# Altium PCB Gator Stream Receiver.PcbDoc
Units mil, origin at the board's own origin, x right, y up, seen from the top; angles counter-clockwise.
Board outline 3850 x 2100 mil, 2 copper layers (Top Layer, Bottom Layer); 36 components, 38 nets, 262 pads, 49 vias.
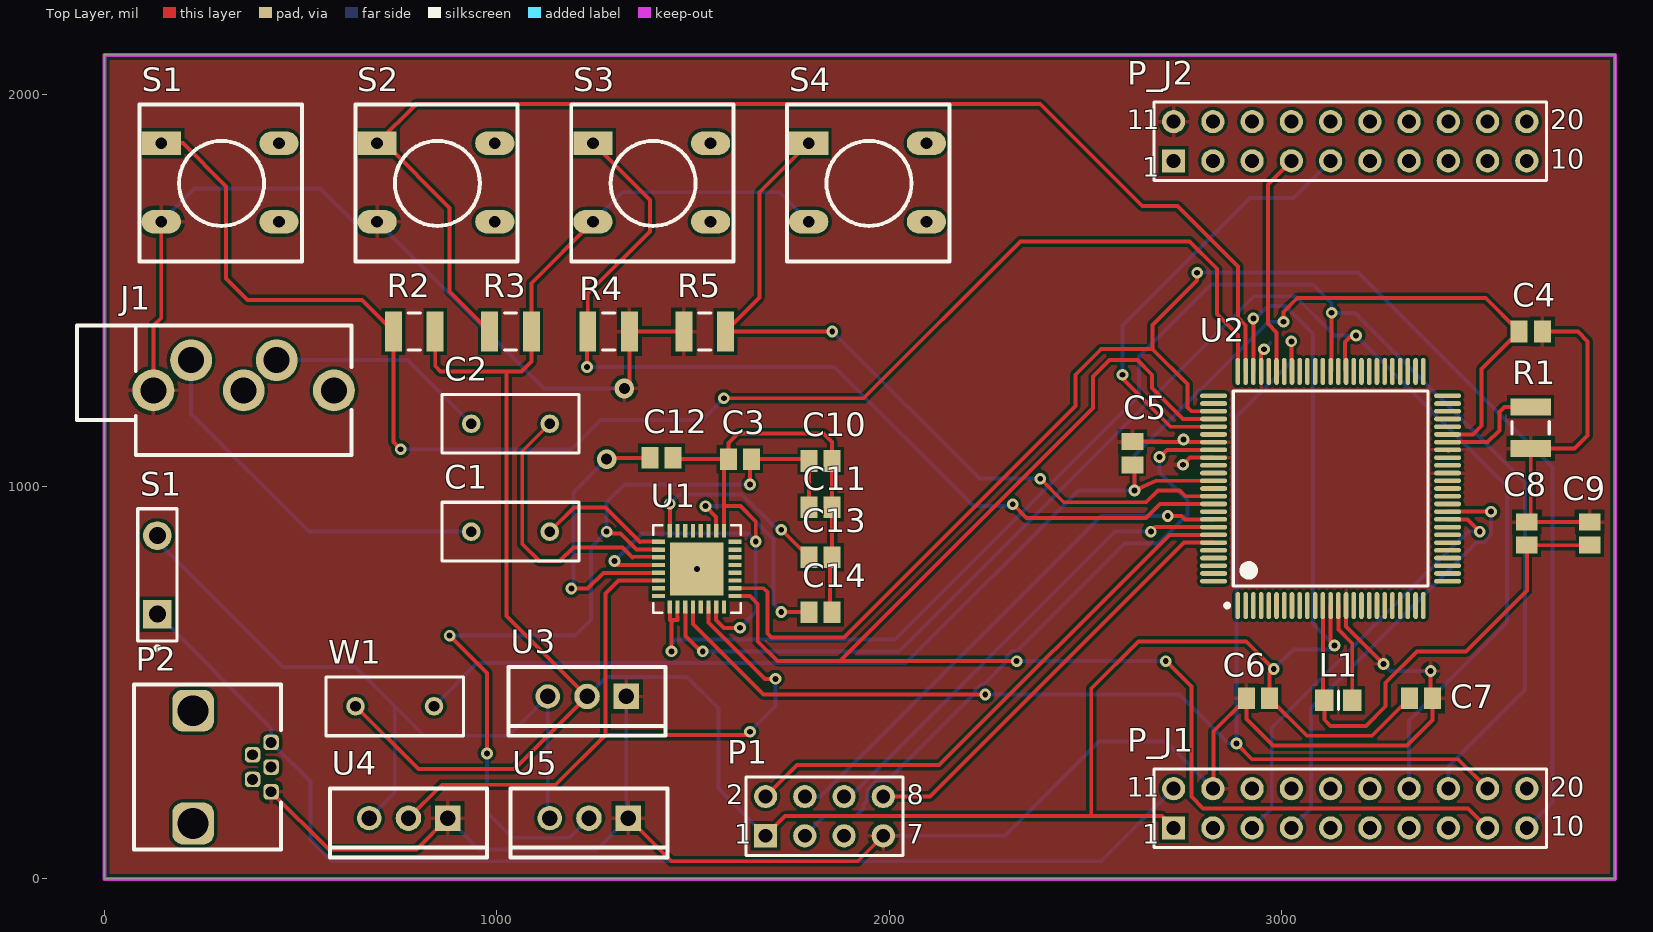
[diagram p0: Top Layer view]
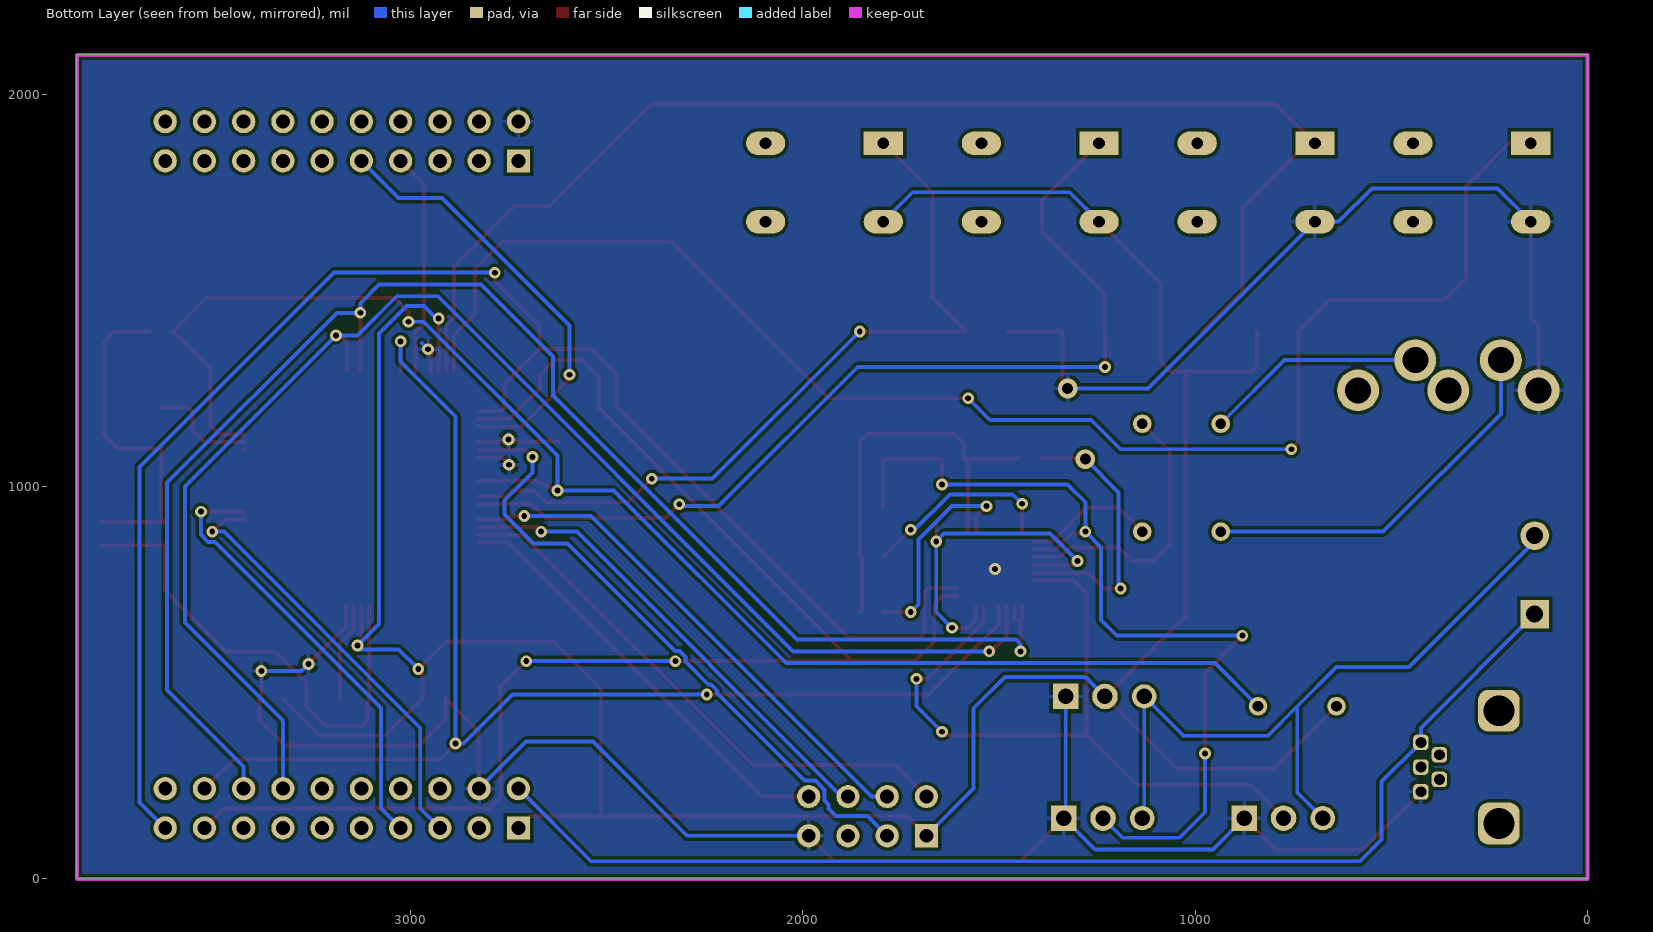
[diagram p1: Bottom Layer view, seen from below]

## Layer stack, top to bottom
Top Solder: solder mask 0.4, Solder Resist, Dk 3.5
Top Layer: signal copper 1.4
Dielectric 1: dielectric 12.6, FR-4, Dk 4.8
Bottom Layer: signal copper 1.4
Bottom Solder: solder mask 0.4, Solder Resist, Dk 3.5

## Board outline
0,0 0,2100 3850,2100 3850,0

## Design rules (kind name [scope] priority, off if disabled: settings)
Clearance [All] p1: gap=6 except(8: Arc-Poly Track-Poly SMDPad-Poly THPad-Poly Via-Poly Fill-Poly Poly-Poly)
PolygonConnect [All] p1: connectstyle=Relief reliefconductorwidth=10 reliefentries=4 polygonreliefangle="90 Angle" airgapwidth=10
RoutingVias [All] p1: holewidth=15 width=30 viastyle="Through Hole" minholewidth=13 minwidth=30 maxholewidth=28 maxwidth=50
SolderMaskExpansion [All] p1: expansion=4
Width [All] p1: maxlimit=10 minlimit=6 preferedwidth=10
30 further rules are at their usual default settings.

## Classes and differential pairs
component class "Gator Stream Receiver Top Sheet": C1 C2 J1 P2 R2 R3 R4 R5 R? S1 S2 S3 S4 S? U3 U4 U5 U?
component class MSP432: C4 C5 C6 C7 C8 C9 L1 P1 P_J1 P_J2 R1 U2 W1
component class "Audio output Codec": C3 C10 C11 C12 C13 C14 C? U1

## Components (designator, comment, footprint, x,y, rotation, side; value= is the part's Value field where it differs from the comment)
C1 "Cap Pol2" RAD-0.2 1035,885 r180 top
C2 "Cap Pol2" RAD-0.2 1035,1160 r180 top
C3 "Cap" C0805 1620,1070 r180 top
C4 "Cap" C0805 3635,1395 r0 top
C5 "Cap" C0805 2620,1085 r90 top
C6 "Cap" C0805 2940,460 r180 top
C7 "C5" C0805 3355,460 r0 top
C8 "Cap" C0805 3625,880 r270 top
C9 "Cap" C0805 3785,880 r90 top
C10 "Cap" C0805 1825,1065 r0 top
C11 "Cap" C0805 1825,947 r0 top
C12 "Cap" C0805 1420,1073.11 r0 top
C13 "Cap" C0805 1825,820 r0 top
C14 "Cap" C0805 1825,680 r0 top
J1 "3.5mm jack GM" "3.5mm jack GM" 125,1245 r270 top
L1 "LQM21PN4R7NGR" 6-0805_N 3144.69,455 r0 top
P1 "Header 4X2" HDR2X4 1685,110 r0 top
P2 "USB B mini TH" "USB B mini Molex" 425,285 r90 top
P_J1 "Header 10X2A" HDR2X10_CEN 2725,130 r0 top
P_J2 "Header 10X2A" HDR2X10_CEN 2725,1830 r0 top
R1 "Res3" 14-1210 3635,1150 r90 top
R2 "Res3" 14-1210 790,1395 r0 top
R3 "Res3" 14-1210 1035,1395 r0 top
R4 "Res3" 14-1210 1285,1395 r180 top
R5 "Res3" 14-1210 1530,1395 r0 top
S1 "Power Switch" SPST-2 135,775 r90 top
S1 "Disconnect" "SW PB" 145,1875 r0 top
S2 "Pause/Play" "SW PB" 695,1875 r0 top
S3 "FFW" "SW PB" 1245,1875 r0 top
S4 "REW" "SW PB" 1795,1875 r0 top
U1 "TLV320AIC3254_RH" RHB32_3P45X3P45 1510,790 r90 top
U2 "XMS432P401RIPZR" PZ0100A_N 3125,995 r90 top
U3 "LT1086  3.3V" TO-220 1130,465 r180 top
U4 "LT1086  3.3V" TO-220 675,155 r180 top
U5 "LT1086  3.3V" TO-220 1135,155 r180 top
W1 "Jumper" RAD-0.2 740,440 r180 top

## Footprints (in the part's own frame and the unit in brackets; to place one, negate y for a bottom-side part, rotate by r counter-clockwise, add the part's x,y. Pads: shape width x height; smd on the part's side, far side on the other; paste and mask are expansions set on the pad)
"3.5mm jack GM" [mil]
  round 106.5 hole 66.5: 1(0,0) 2(-77,96) 3(0,230) 4(-77,314) 5(0,460)
  silkscreen extent -165,-195 165,505
6-0805_N [mm] "Chip Resistor, Body 2.0x1.2mm, IPC Medium Density"
  rect 1.2x1.4 smd: 1(-0.9,0) 2(0.9,0)
  silkscreen extent 0,-0.6 0,0.6, body extent -1.07,-0.7 1.07,0.7, height 0.7
14-1210 [mm] "Chip Resistor, Body 3.2x2.5mm, IPC High Density"
  rect 1.1x2.6 smd: 1(-1.35,0) 2(1.35,0)
  silkscreen extent -0.4,-1.2 0.4,1.2, body extent -1.68,-1.32 1.68,1.32, height 0.9
C0805 [mm] "Chip Capacitor, Body 2.0x1.3mm, IPC High Density"
  rect 1.1x1.4 smd: 1(-0.75,0) 2(0.75,0)
  body extent -1.1,-0.72 1.1,0.72, height 1.4
HDR2X4 [mm] "Connector; Header; 4x2 Position"
  rect 1.5x1.5 hole 0.9: 1(0,0)
  round 1.5 hole 0.9: 2(0,2.54) 3(2.54,0) 4(2.54,2.54) 5(5.08,0) 6(5.08,2.54) 7(7.62,0) 8(7.62,2.54)
  silkscreen extent -1.27,-1.27 8.89,3.81
HDR2X10_CEN [mm] "Connector; Header; 10x2 Position"
  rect 1.5x1.5 hole 0.9: 1(0,0)
  round 1.5 hole 0.9: 2(2.54,0) 3(5.08,0) 4(7.62,0) 5(10.16,0) 6(12.7,0) 7(15.24,0) 8(17.78,0) 9(20.32,0) 10(22.86,0) 11(0,2.54) 12(2.54,2.54) 13(5.08,2.54) 14(7.62,2.54) 15(10.16,2.54) 16(12.7,2.54) 17(15.24,2.54) 18(17.78,2.54) 19(20.32,2.54) 20(22.86,2.54)
  silkscreen extent -1.27,-1.27 24.13,3.81
PZ0100A_N [mm]
  oval 1.75x0.3 smd paste+0 mask+0.051: 1(-7.575,6) 2(-7.575,5.5) 3(-7.575,5) 4(-7.575,4.5) 5(-7.575,4) 6(-7.575,3.5) 7(-7.575,3) 8(-7.575,2.5) 9(-7.575,2) 10(-7.575,1.5) 11(-7.575,1) 12(-7.575,0.5) 13(-7.575,0) 14(-7.575,-0.5) 15(-7.575,-1) 16(-7.575,-1.5) 17(-7.575,-2) 18(-7.575,-2.5) 19(-7.575,-3) 20(-7.575,-3.5) 21(-7.575,-4) 22(-7.575,-4.5) 23(-7.575,-5) 24(-7.575,-5.5) 25(-7.575,-6) 51(7.575,-6) 52(7.575,-5.5) 53(7.575,-5) 54(7.575,-4.5) 55(7.575,-4) 56(7.575,-3.5) 57(7.575,-3) 58(7.575,-2.5) 59(7.575,-2) 60(7.575,-1.5) 61(7.575,-1) 62(7.575,-0.5) 63(7.575,0) 64(7.575,0.5) 65(7.575,1) 66(7.575,1.5) 67(7.575,2) 68(7.575,2.5) 69(7.575,3) 70(7.575,3.5) 71(7.575,4) 72(7.575,4.5) 73(7.575,5) 74(7.575,5.5) 75(7.575,6)
  oval 0.3x1.75 smd paste+0 mask+0.051: 26(-6,-7.575) 27(-5.5,-7.575) 28(-5,-7.575) 29(-4.5,-7.575) 30(-4,-7.575) 31(-3.5,-7.575) 32(-3,-7.575) 33(-2.5,-7.575) 34(-2,-7.575) 35(-1.5,-7.575) 36(-1,-7.575) 37(-0.5,-7.575) 38(0,-7.575) 39(0.5,-7.575) 40(1,-7.575) 41(1.5,-7.575) 42(2,-7.575) 43(2.5,-7.575) 44(3,-7.575) 45(3.5,-7.575) 46(4,-7.575) 47(4.5,-7.575) 48(5,-7.575) 49(5.5,-7.575) 50(6,-7.575) 76(6,7.575) 77(5.5,7.575) 78(5,7.575) 79(4.5,7.575) 80(4,7.575) 81(3.5,7.575) 82(3,7.575) 83(2.5,7.575) 84(2,7.575) 85(1.5,7.575) 86(1,7.575) 87(0.5,7.575) 88(0,7.575) 89(-0.5,7.575) 90(-1,7.575) 91(-1.5,7.575) 92(-2,7.575) 93(-2.5,7.575) 94(-3,7.575) 95(-3.5,7.575) 96(-4,7.575) 97(-4.5,7.575) 98(-5,7.575) 99(-5.5,7.575) 100(-6,7.575)
  silkscreen extent -7.7,-6.3 6.3,6.82, body extent 0,0 0.25,0.25, height 0.25
RAD-0.2 [mm] "Radial Cap, Thru-Hole; 2 Leads; 0.2 in Pin Spacing"
  round 1.2 hole 0.7: 1(-2.54,0) 2(2.54,0)
  silkscreen extent -4.44,-1.91 4.44,1.91
RHB32_3P45X3P45 [mm]
  rect 0.85x0.28 smd paste-0.412: 1(-2.475,1.75) 2(-2.475,1.25) 3(-2.475,0.75) 4(-2.475,0.25) 5(-2.475,-0.25) 6(-2.475,-0.75) 7(-2.475,-1.25) 8(-2.475,-1.75) 17(2.475,-1.75) 18(2.475,-1.25) 19(2.475,-0.75) 20(2.475,-0.25) 21(2.475,0.25) 22(2.475,0.75) 23(2.475,1.25) 24(2.475,1.75)
  rect 0.28x0.85 smd paste-0.412: 9(-1.75,-2.475) 10(-1.25,-2.475) 11(-0.75,-2.475) 12(-0.25,-2.475) 13(0.25,-2.475) 14(0.75,-2.475) 15(1.25,-2.475) 16(1.75,-2.475) 25(1.75,2.475) 26(1.25,2.475) 27(0.75,2.475) 28(0.25,2.475) 29(-0.25,2.475) 30(-0.75,2.475) 31(-1.25,2.475) 32(-1.75,2.475)
  rect 3.45x3.45 smd paste-1.712 mask-1.714: 33(0,0)
  silkscreen extent -2.83,-2.83 2.83,2.83, body extent -2.63,-2.63 2.63,2.63, height 1.4
SPST-2 [mm] "Switch; 2 Leads"
  rect 1.85x1.85 hole 1.1: 1(-2.54,0)
  round 1.85 hole 1.1: 2(2.54,0)
  silkscreen extent -4.89,-1.27 4.28,1.27
"SW PB" [mil]
  rect 100x60 hole 30: 1(0,0)
  oval 100x60 hole 30: 2(0,-200) 3(300,-200) 4(300,0)
  silkscreen extent -55,-302 358,98
TO-220 [mil]
  rect 65x65 hole 39.4: 1(-200,0)
  round 65 hole 39.4: 2(-100,0)
  round 62 hole 39.4: 3(0,0)
  silkscreen extent -300,-75 100,100
"USB B mini Molex" [mm]
  rrect50% 2.7x2.7 hole 2: 0(-3.65,5.05) 0(3.65,5.05)
  rrect50% 1x1 hole 0.7: 1(1.6,0) 2(0.8,1.2) 3(0,0) 4(-1.6,0) 5(-0.8,1.2)
  silkscreen extent -5.33,-0.64 5.33,8.89

## Part data
C1 C2: "Polarized Capacitor (Axial)"
C3 C4 C5 C6 C7 C10 C11 C12 C13 C14: library part "Cap Pol3", "Polarized Capacitor (Surface Mount)"
C8 C9: library part "Cap Semi", "Capacitor (Semiconductor SIM Model)"
L1: library part Inductor, "Inductor"
P1: "Header, 4-Pin, Dual row"
P_J1 P_J2: "Header, 10-Pin, Dual row"
R1 R2 R3 R4 R5: "Resistor"
S1: library part SW-SPST, "Single-Pole, Single-Throw Switch"
S1 S2 S3 S4: library part SW-PB, "DIGIKEY SW400-ND"
U1 U2: "Imported"
W1: "Jumper Wire"

## Via types
v1: diameter 30, hole 15, Top Layer to Bottom Layer, 47 vias
v2: diameter 50, hole 28, Top Layer to Bottom Layer, 2 vias

## Nets (pads, with @x,y where several pads share a name; then routed paths per layer and width w, separated by ;. In a path a pad name is that pad's centre, name@x,y a point inside that pad or via, vN(x,y) a via of type N, cw(c..) or ccw(c..) an arc to the next point about the centre after c; other vN are vias at no path point)
3V3: C6.1 C7.1 P1.1 P_J1.1 R2.2 R3.2 S3.2 S4.2 U2.13 U2.73 U3.2 W1.2 | length 7686.9
  Top Layer w10: W1.2 800,280 1045,280 U3.2 1025,670 1025,1293.23 ; R2.2 843.15,1306.85 856.77,1293.23 1025,1293.23 ; S3.2 1088.15,1518.15 R3.2 1088.15,1318.15 1063.23,1293.23 1025,1293.23 ; P1.1 1735,160 2515,160 ; P_J1.1 2695,160 2515,160 ; U2.73 v1(2928.15,1428.15) ; U2.13 3125,605 v1(3135,595) ; C7.1 3230.47,365 3064.53,365 C6.1 2969.53,524.53 v1(2980,535) 2910,605 2635,605 2515,485 2515,160
  Bottom Layer w10: U3.2 1280,515 1485,515 1565,435 1565,230 P1.1 ; S3.2 1320,1750 1720,1750 S4.2 ; v1(2928.15,1428.15) 2933.15,1428.15 2965,1460 3010,1460 3080,1390 3080,650 v1(3135,595) 3135,585 3030,585 v1(2980,535)
5V: P2.1 P_J1.11 S1.1@135,675 | length 3036
  Bottom Layer w10: S1.1@135,675 425,385 P2.1 525,247.99 525,100 580,45 2540,45 P_J1.11
AUDIO_OUT_L: C1.1 U1.25 | length 340.8
  Top Layer w10: C1.1 1197,947 1277.22,947 1365.31,858.91 1366.81,860.41 U1.25@1413.02,860.41
AUDIO_OUT_R: C2.1 U1.27 | length 727
  Top Layer w10: C2.1 1065,1090 1065,853.91 1108.91,810 1160,810 1195,845 1320,845 1345.47,819.54 1346.97,821.04 U1.27@1413.02,821.04
CODEC_GND: C3.2 C10.2 C11.2 C12.2 C13.2 C14.2 U1.7 U1.17 U1.28 | length 2084.6
  Top Layer w10: v1(1300,810) 1310.16,799.85 U1.28 ; C12.2 1452.64,1070 C3.2 ; U1.7 1559.21,659.41 1578.62,640 v1(1620,640) ; U1.17 1578.9,1058.43 C3.2 ; 1583.9,950 1620.94,950 1660,910.94 v1(1660,860) ; C13.2@1849.53,820 1849.53,685 C14.2 ; C13.2 C11.2 C10.2 1854.53,1113.58 1833.11,1135 1615,1135 1590.47,1110.47 C3.2
  Bottom Layer w10: v1(1300,810) 1370,880 1640,880 v1(1660,860) 1660,680 v1(1620,640)
CODEC_IOVDD: U1.6 U1.30 U4.2 | length 1919.2
  Top Layer w10: U4.2 860,240 1150,240 1277.22,367.22 ; 1277.22,520 1277.22,367.22 ; 1277.22,525 1277.22,727.38 1310,760.15 1388.48,760.15 ; 1365.31,760.46 U1.30 ; U1.6 1539.53,653.62 1683.15,510 v1(1710,510) ; v1(1645,375) 1637.22,367.22 1277.22,367.22
  Bottom Layer w10: v1(1645,375) 1710,440 v1(1710,510)
CODEC_LDOIN: C3.1 C10.1 C11.1 U1.26 U5.2 | length 2344.7
  Top Layer w10: v1(880,620) 975,525 v1(975,320) ; v1(1280,885) 1285,880 1315,880 1355.78,839.22 U1.26 ; v1(1645,1005) C3.1@1645,1065.47 ; C3.1 C10.1@1790.47,1070 ; C11.1 C10.1
  Bottom Layer w10: v1(880,620) 1200,620 1240,660 1240,845 v1(1280,885) 1280,960 1325,1005 v1(1645,1005) ; v1(975,320) 975,170 1040,105 1185,105 U5.2
CODEC_RESET: U1.31
DISCONNECT: R2.1 S1.1@145,1875 U2.75 | length 3848.4
  Top Layer w10: S1.1@145,1875 200,1875 310,1765 310,1530 365,1475 656.85,1475 R2.1 736.85,1113.15 v1(755,1095) ; v1(1578.62,1225) 1935,1225 2335,1625 2765,1625 2835,1555 2835,1440 2888.78,1386.22 U2.75
  Bottom Layer w10: v1(755,1095) 1190,1095 1265,1170 1523.62,1170 v1(1578.62,1225)
FFW: R4.2 S3.1 U2.90 | length 2478.9
  Top Layer w10: v1(1230,1305) R4.2@1230,1393.15 ; R4.2 1231.85,1491.85 1390,1650 1390,1730 S3.1 ; v1(2315,955) 2350,920 2655,920 2690.63,955.63 U2.90
  Bottom Layer w10: v1(1230,1305) 1860,1305 2215,950 2320,950 v1(2315,955)
GND: C4.2 C5.2 C6.2 C7.2 C8.1 C9.2 J1.1 P1.7 P2.4 P_J1.12 P_J2.11 R1.1 R4.1 R5.1 S1.2@145,1675 S2.2 U1.33 U2.15 U2.40 U2.43 U2.72 U2.82 U2.84 U3.1 U4.1 U5.1 | length 7832.7
  Top Layer w10: J1.1 125,1410 145,1430 S1.2@145,1675 ; P2.4 572.01,75 795,75 U4.1 ; v2(1325,1250) 1338.15,1263.15 R4.1 R5.1 ; U5.1 1445,45 1920,45 P1.7 ; C5.2 2693.58,1114.53 ; 2656.42,1113.11 v1@2745,1113.11 ; v1(2748.5,1055.47) 2766.77,1073.74 U2.84 ; v1(2750,1120) 2750,1118.11 2755,1113.11 U2.82 ; P_J1.12 2826.77,231.77 2826.77,376.3 C6.2 2910.47,407.52 2977.99,340 3320,340 3384.53,404.53 C7.2 ; U2.72 2947.83,1349.71 2954.71,1349.71 v1(2955,1350) ; U2.15 3164.37,643.43 v1(3260,547.8) ; C7.2@3380,464.53 v1(3380,530) ; U2.43 U2.43@3426.01,1090.65 ; C4.2 3755,1395 3780,1370 3780,1130 3746.85,1096.85 R1.1 3635,919.53 C8.1 C9.2
  Bottom Layer w10: S1.2@145,1675 230,1760 550,1760 635,1675 S2.2 1120,1250 v2(1325,1250) ; U4.1 955,75 1255,75 U5.1 ; U5.1@1330,160 U3.1 ; P1.7 2295,110 2535,350 2705,350 P_J1.12 ; v1(2750,1120) v1@2750,1132.96 ; v1(2955,1350) 2971.2,1366.2 ; v1(3260,547.8) 3277.8,530 v1(3380,530)
  other v1: 1510,790
I2S_BCLK: P_J1.18 U1.1 U1.2 U2.63 | length 4034.1
  Top Layer w10: U1.1 1441.1,660 1450.94,660 ; v1(1445,580) 1445,654.06 1450.94,660 ; U1.2@1459.96,692.56 1459.96,669.61 1460.79,668.79 1460.79,660 1450.94,660 ; U2.63 3127.78,1296.01 v1(3127.78,1442.78)
  Bottom Layer w10: v1(1445,580) 1445,598.11 1456.89,610 2015,610 2636.77,1231.77 2636.77,1331.77 2820,1515 3080,1515 3127.78,1467.22 v1(3127.78,1442.78) 3187.22,1442.78 3620,1010 3620,481.5 3425,286.5 P_J1.18
I2S_FS: P_J1.17 U1.3 U2.61 | length 3740.9
  Top Layer w10: U1.3 1480.47,619.53 1520,580 v1(1525,580) ; U2.61@3161.59,1296.01 3161.59,1368.41 3178.18,1385 v1(3190,1385)
  Bottom Layer w10: v1(1525,580) 2025,580 2930,1485 3035,1485 3135,1385 v1(3190,1385) 3575,1000 3575,654.06 3325,404.06 P_J1.17
I2S_SDOUT: P_J1.19 U1.4 U2.68 | length 3399.6
  Top Layer w10: U1.4 1500.16,650 1680.16,470 v1(2245,470) ; v1(2885,345) 2925,305 3450,305 P_J1.19 ; U2.68@3025,1294.8 v1(3025,1370)
  Bottom Layer w10: v1(2245,470) 2740,470 2865,345 v1(2885,345) 2885,1178.38 3025,1318.38 v1(3025,1370)
MSP_AVCC: C4.1 C5.1 U2.45 U2.87 W1.1 | length 3946.1
  Top Layer w10: C5.1@2625,1055.47 v1(2625,990) 2679.69,1014.69 U2.87 ; v1(3005,1420) 3005,1445 3040,1480 3520.47,1480 C4.1 3510,1299.53 3510,1155 3487.8,1132.8 U2.45
  Bottom Layer w10: W1.1 950,550 2042.21,550 2482.21,990 v1(2625,990) 2625,1078.7 2966.3,1420 v1(3005,1420)
MSP_CODEC_SCL: P_J1.9 U1.9 U2.79 | length 3781.2
  Top Layer w10: U1.9 1645,721.09 1665,701.09 1665,605 1715,555 1875,555 ; v1(2325,555) 1875,555 ; v1(2705,555) 2770,490 2770,210 2800,180 3475,180 P_J1.9 ; U2.79 2748.5,1172.17 2670,1250.67 2670,1285 2633,1322 2562,1322 2520,1280 2520,1200 1875,555
  Bottom Layer w10: v1(2325,555) v1(2705,555)
MSP_CODEC_SDA: P_J1.10 U1.10 U2.78 | length 4084.1
  Top Layer w10: U1.10 1680,740.78 1690,730.78 1690,625 1700,615 1885,615 2475,1205 2475,1285 2540,1350 2671.43,1350 ; v1(2785,1545) 2785,1525 2671.43,1411.43 2671.43,1350 ; U2.78 2770,1191.85 2760,1201.85 2760,1261.43 2671.43,1350
  Bottom Layer w10: v1(2785,1545) 3195,1545 3690,1050 3690,195 P_J1.10
NetC1_2: C1.2 J1.2 | length 975.3
  Bottom Layer w10: J1.2 221,1185 521,885 C1.2
NetC2_2: C2.2 J1.4 | length 563.1
  Bottom Layer w10: J1.4 773,1322 C2.2
NetC12_1: C12.1 U1.29 | length 718.2
  Top Layer w10: v1(1190,740) 1231.5,740 1271.66,780.15 U1.29 ; v2(1280,1070) 1283.11,1073.11 C12.1
  Bottom Layer w10: v1(1190,740) 1195,745 1195,985 v2(1280,1070)
NetC13_1: C13.1 U1.24 | length 498.7
  Top Layer w10: U1.24 v1(1441.1,956.1) ; v1(1725,890) C13.1@1795,820
  Bottom Layer w10: v1(1441.1,956.1) 1465,980 1625,980 1715,890 v1(1725,890)
NetC14_1: C14.1 U1.18 | length 545.8
  Top Layer w10: v1(1532,950) 1559.21,922.79 U1.18 ; v1(1725,680) C14.1
  Bottom Layer w10: v1(1532,950) 1620,950 1705,865 1705,700 v1(1725,680)
NetR1_2: R1.2 U2.44 | length 276.5
  Top Layer w10: U2.44 3525,1113.11 3555,1143.11 3555,1190 3568.15,1203.15 R1.2
PAUSE_PLAY: R3.1 S2.1 U2.74 | length 3293.3
  Top Layer w10: R3.1 880,1496.85 880,1710 715,1875 S2.1 795,1975 2385,1975 2645,1715 2735,1715 2888.78,1561.22 2888.78,1430.75 2908.46,1411.07 U2.74
RESET: P_J2.15
REW: R5.2 S4.1 U2.89 | length 2010.1
  Top Layer w10: S4.1 1670,1750 1670,1481.85 R5.2 v1(1855,1395) ; v1(2385,1020) 2445,960 2655,960 2685,990 2740,990 2754.68,975.32 U2.89
  Bottom Layer w10: v1(1855,1395) 2230,1020 v1(2385,1020)
TCK_MSP: P1.8 U2.95 | length 1109.9
  Top Layer w10: P1.8 2104.22,210 2751.43,857.2 U2.95
TDI_MSP: P1.4 U2.92 | length 1341.6
  Top Layer w10: v1(2710,925) 2745,925 2753.74,916.26 U2.92
  Bottom Layer w10: P1.4 1825,210 2540,925 v1(2710,925)
TDO_MSP: P1.6 U2.93 | length 1226.2
  Top Layer w10: v1(2666.85,885) 2678.43,896.57 U2.93
  Bottom Layer w10: P1.6 1900.94,210 2575.94,885 v1(2666.85,885)
TMS_MSP: P1.2 U2.94 | length 1418
  Top Layer w10: P1.2 1765,290 2127.44,290 2714.33,876.89 U2.94
TRST_MSP: P1.3 U2.83 | length 1667.4
  Top Layer w10: v1(2689.23,1075) 2707.66,1093.43 U2.83
  Bottom Layer w10: P1.3 1835,160 1915,160 1935,180 1935,190 1944.47,199.47 1944.47,226.79 1968.21,250.53 1995.53,250.53 2219,474 2219,480.77 2234.23,496 2241,496 2299,554 2299,565.77 2314.23,581 2326,581 2600,855 2685.94,855 2760,929.06 2760,965 2689.23,1035.77 v1(2689.23,1075)
UART_CTS_1: P_J2.4 U2.70 | length 570.8
  Top Layer w10: U2.70 2987.2,1392.8 2965,1415 2965,1770 P_J2.4
UART_RTS_1: P_J2.5 U2.80 | length 1121.5
  Top Layer w10: v1(2595,1285) 2595,1275 2717.52,1152.48 U2.80
  Bottom Layer w10: v1(2595,1285) 2595,1410 2920,1735 3030,1735 P_J2.5
UART_RX_1: P_J1.4 U2.35 | length 1137.8
  Top Layer w10: U2.35 v1(3534.06,935.94)
  Bottom Layer w10: P_J1.4 3075,180 3075,435.57 3498.43,859 3515.77,859 3534.06,877.29 v1(3534.06,935.94)
UART_TX_1: P_J1.3 U2.34 | length 1107.5
  Top Layer w10: U2.34 3473.74,916.26 v1(3505,885)
  Bottom Layer w10: P_J1.3 2975,180 2975,385 3475,885 v1(3505,885)
VCC: S1.2@135,875 U3.3 U4.3 U5.3 | length 1873.4
  Bottom Layer w10: S1.2@135,875 135,860 455,540 640,540 740,440 ; U4.3 740,220 740,440 ; U5.3@1130,160 U3.3 1030,365 815,365 740,440
VCORE: C8.2 C9.1 L1.1 U2.12 | length 1262.9
  Top Layer w10: L1.1@3105.31,458.94 U2.12 ; L1.1 3109.25,405.75 3125,390 3215,390 3265,440 3265,500 3345,580 3470,580 3625,735 C8.2 C9.1
VSW: L1.2 U2.14 | length 256.4
  Top Layer w10: U2.14 3144.69,635.31 3180.12,599.88 L1.2
pads on no net: J1.3 J1.5 P1.5 P2.0 P2.2 P2.3 P2.5 P_J1.2 P_J1.5 P_J1.6 P_J1.7 P_J1.8 P_J1.13 P_J1.14 P_J1.15 P_J1.16 P_J1.20 P_J2.1 P_J2.2 P_J2.3 P_J2.6 P_J2.7 P_J2.8 P_J2.9 P_J2.10 P_J2.12 P_J2.13 P_J2.14 P_J2.16 P_J2.17 P_J2.18 P_J2.19 P_J2.20 S1.3 S1.4 S2.3 S2.4 S3.3 S3.4 S4.3 S4.4 U1.5 U1.8 U1.11 U1.12 U1.13 U1.14 U1.15 U1.16 U1.19 U1.20 U1.21 U1.22 U1.23 U1.32 U2.1 U2.2 U2.3 U2.4 U2.5 U2.6 U2.7 U2.8 U2.9 U2.10 U2.11 U2.16 U2.17 U2.18 U2.19 U2.20 U2.21 U2.22 U2.23 U2.24 U2.25 U2.26 U2.27 U2.28 U2.29 U2.30 U2.31 U2.32 U2.33 U2.36 U2.37 U2.38 U2.39 U2.41 U2.42 U2.46 U2.47 U2.48 U2.49 U2.50 U2.51 U2.52 U2.53 U2.54 U2.55 U2.56 U2.57 U2.58 U2.59 U2.60 U2.62 U2.64 U2.65 U2.66 U2.67 U2.69 U2.71 U2.76 U2.77 U2.81 U2.85 U2.86 U2.88 U2.91 U2.96 U2.97 U2.98 U2.99 U2.100

## Polygon pours and split planes (outlines as drawn)
GND on Bottom Layer "Bottom Layer-GND" (solid, pour order 6): 0,0 0,2100 3850,2100 3850,0
GND on Top Layer "Top Layer-GND" (solid, pour order 4): 0,2100 3850,2100 3850,0 0,0

## Keep-outs
Keep-Out Layer:
  the board outline again, w10

## Text inside footprints (layer, text, board x,y; h text height)
P1: Top Overlay "8" at 2045,190 h50; Top Overlay "7" at 2045,90 h50; Top Overlay "1" at 1605,90 h50; Top Overlay "2" at 1585,190 h50
P_J1: Top Overlay "1" at 2645,90 h50; Top Overlay "1" at 2605,210 h50; Top Overlay "1" at 2645,210 h50; Top Overlay "10" at 3685,110 h50; Top Overlay "20" at 3685,210 h50
P_J2: Top Overlay "1" at 2645,1790 h50; Top Overlay "1" at 2605,1910 h50; Top Overlay "1" at 2645,1910 h50; Top Overlay "10" at 3685,1810 h50; Top Overlay "20" at 3685,1910 h50